# Altium PCB CH340G.PcbDoc
Units mil, origin at the board's own origin, x right, y up, seen from the top; angles counter-clockwise.
Board outline 1350 x 550 mil, 2 copper layers (Top Layer, Bottom Layer); 9 components, 9 nets, 40 pads, 8 vias.
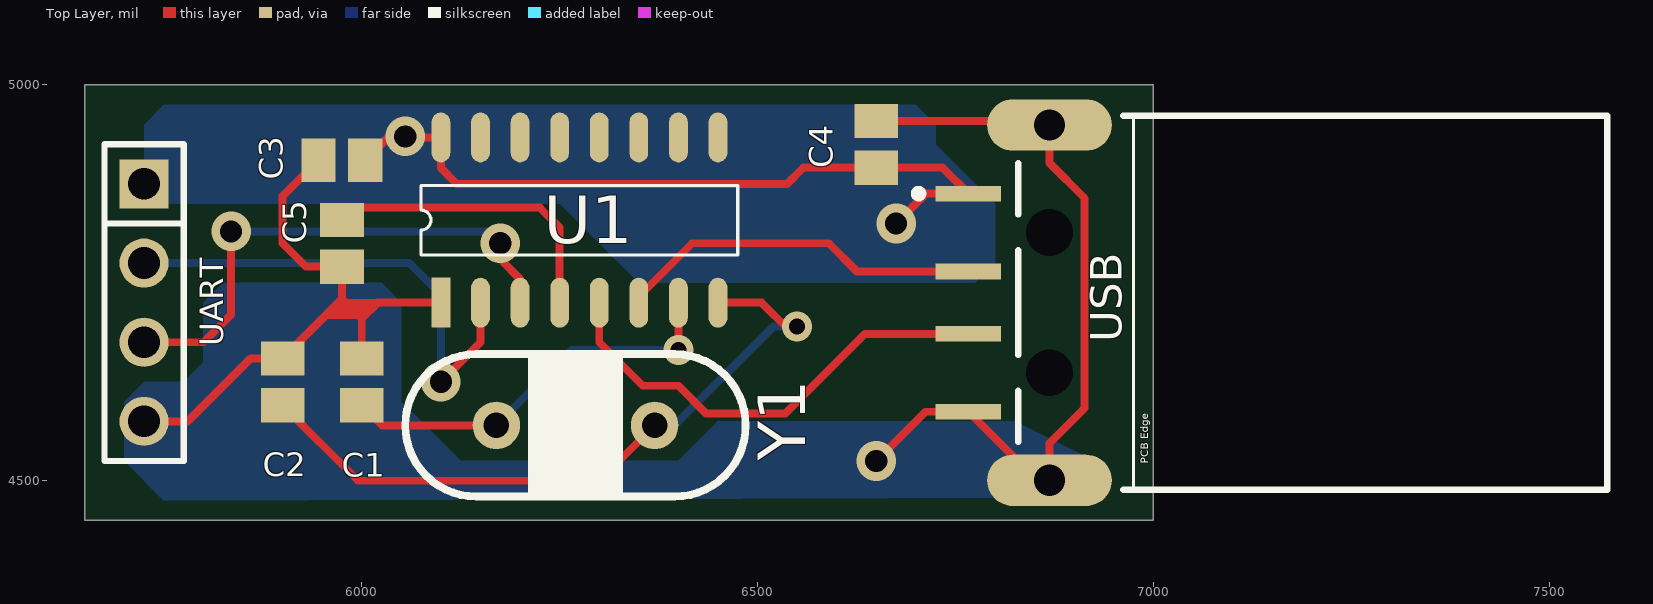
[diagram p0: Top Layer view]
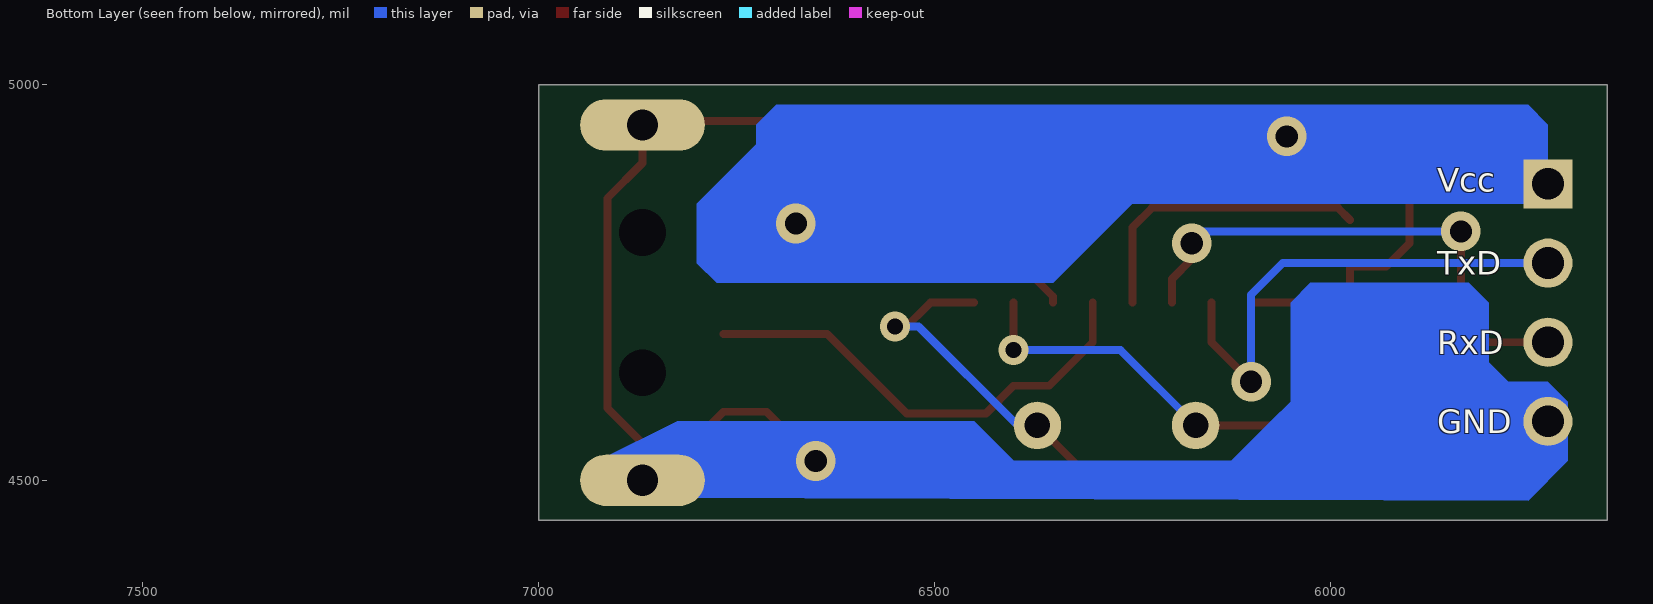
[diagram p1: Bottom Layer view, seen from below]

## Layer stack, top to bottom
Top Solder: solder mask 0.4, Solder Resist, Dk 3.5
Top Layer: signal copper 1.4
Dielectric 1: dielectric 12.6, FR-4, Dk 4.8
Bottom Layer: signal copper 1.4
Bottom Solder: solder mask 0.4, Solder Resist, Dk 3.5

## Board outline
5650,4450 5650,5000 7000,5000 7000,4450

## Design rules (kind name [scope] priority, off if disabled: settings)
Clearance [All] p1: gap=10 ignorepadtopadclearanceinfootprint=FALSE except(0: Arc-Hole Track-Hole SMDPad-Hole THPad-Hole Via-Hole Fill-Hole Poly-Hole Region-Hole Text-Hole)
PolygonConnect [All] p1: connectstyle=Relief reliefconductorwidth=10 reliefentries=4 polygonreliefangle="90 Angle" airgapwidth=10
RoutingVias [All] p1: holewidth=28 width=50 viastyle="Through Hole" minholewidth=28 minwidth=50 maxholewidth=28 maxwidth=50
SolderMaskExpansion [All] p1: expansion=4
Width [All] p1: maxlimit=10 minlimit=10 preferedwidth=10
30 further rules are at their usual default settings.

## Components (designator, comment, footprint, x,y, rotation, side; value= is the part's Value field where it differs from the comment)
C1 "Cap" C0805 6000,4625 r270 top value=30pF
C2 "Cap" C0805 5900,4625 r270 top value=30pF
C3 "Cap" C0805 5975,4905 r0 top value=10uF
C4 "Cap" C0805 6650,4925 r270 top value=104
C5 "Cap" C0805 5975,4800 r90 top value=104
U1 "CH340G" SOP16 6100,4725 r90 top
UART "UART" SIP4-2.54 5725,4725 r270 top (schematic designator J0)
USB "USB" USB01 6975,4725 r0 top (schematic designator P1)
Y1 "12M" X-HC-49S 6270,4570 r0 top

## Footprints (in the part's own frame and the unit in brackets; to place one, negate y for a bottom-side part, rotate by r counter-clockwise, add the part's x,y. Pads: shape width x height; smd on the part's side, far side on the other; paste and mask are expansions set on the pad)
C0805 [mm] "Chip Capacitor, Body 2.0x1.3mm, IPC High Density"
  rect 1.1x1.4 smd: 1(-0.75,0) 2(0.75,0)
  body extent -1.1,-0.72 1.1,0.72, height 1.4
SIP4-2.54 [mil]
  rect 62x62 hole 40: 1(-150,0)
  round 62 hole 40: 2(-50,0) 3(50,0) 4(150,0)
  silkscreen extent -200,-50 200,50
SOP16 [mm]
  rect 1.6x0.6 smd: 1(0,0)
  oval 1.6x0.6 smd: 2(0,-1.27) 3(0,-2.54) 4(0,-3.81) 5(0,-5.08) 6(0,-6.35) 7(0,-7.62) 8(0,-8.89) 9(5.3,-8.89) 10(5.3,-7.62) 11(5.3,-6.35) 12(5.3,-5.08) 13(5.3,-3.81) 14(5.3,-2.54) 15(5.3,-1.27) 16(5.3,0)
  silkscreen extent 1.53,-9.53 3.77,0.64
USB01 [mm] "Connector; USB1.1, Type A, SM; 4 Position; Right Angle"
  rect 2.1x0.5 smd: 1(-5.3,3.5) 2(-5.3,1) 3(-5.3,-1) 4(-5.3,-3.5)
  oval 4x1.65 hole 1: 5(-2.7,-5.7) 6(-2.7,5.7)
  round 1.2 hole 1.5 unplated: MH1(-2.7,-2.25) MH2(-2.7,2.25)
  silkscreen extent -7.02,-6 15.2,6
X-HC-49S [mil] "插件晶振"
  round 60 hole 32: 1(-100,0) 2(100,0)
  silkscreen extent -215,-90 215,90

## Part data
C1 C2 C3 C4 C5: "Capacitor", LatestRevisionDate=17-Jul-2002, LatestRevisionNote="Re-released for DXP Platform.", PackageDescription="Radial Cap, Thru-Hole; 2 Leads; 0.3 in Pin Spacing", PackageReference=RAD-0.3, Published=8-Jun-2000, Publisher="Altium Limited"
USB: "USB 1.1, Right Angle, SMT, A Type, Plug, 4 Position, Natural", PackageDocument=21-Jan-2003, ComponentLink1Description="Manufacturer Link", ComponentLink1URL=http://www.tycoelectronics.com/, ComponentLink2Description="Packaging Specification", ComponentLink2URL=http://ecommas.tycoelectronics.com/commerce/DocumentDelivery/DDEController?Action=showdoc&DocId=Customer+Drawing%7F1470695%7FO%7Fpdf%7FEnglish%7FC_1470695_O.pdf, ContactMaterial=Brass, ContactPlating="Gold (30) over Nickel (50)", DatasheetDocument=21-Jan-2003, DrillSize="Corresponds to nominal value.", HousingMaterial=Thermoplastic, PackageReference=1470695A, PanelGround=Without, PCB_Layout="Complies with manufacturer's recommendation.", Published=15-Jul-2004, Publisher="Altium Limited"
Y1: library part XTAL, "Crystal Oscillator", LatestRevisionDate=17-Jul-2002, LatestRevisionNote="Re-released for DXP Platform.", PackageDescription="Crystal, Thru-Hole; 2 Leads; Body 3.1 x 8.2 mm (Dia.xH)", PackageReference=R38, Published=8-Jun-2000, Publisher="Altium Limited"

## Via types
v1: diameter 50, hole 28, Top Layer to Bottom Layer, 6 vias
v2: diameter 38, hole 20, Top Layer to Bottom Layer, 2 vias

## Nets (pads, with @x,y where several pads share a name; then routed paths per layer and width w, separated by ;. In a path a pad name is that pad's centre, name@x,y a point inside that pad or via, vN(x,y) a via of type N, cw(c..) or ccw(c..) an arc to the next point about the centre after c; other vN are vias at no path point)
3V3: C5.2 U1.4 | length 386.8
  Top Layer w10: C5.2 5990.47,4845 6225,4845 6250,4820 U1.4
GND: C1.1 C2.1 C3.1 C4.1 C5.1 U1.1 UART.4 USB.4 USB.5 USB.6 | length 1746.7
  Top Layer w10: UART.4 5780,4575 5859.53,4654.53 C2.1 5975,4729.53 ; C3.1 5900,4859.53 5900,4800 5929.53,4770.47 C5.1 5975,4729.53 ; C1.1 6000,4704.53 ; U1.1 6020.47,4725 6000,4704.53 ; v1(6650,4525) 6712.2,4587.2 USB.4 6852.95,4500.59 USB.5 6868.7,4547.36 6913.23,4591.89 6913.23,4856.77 6868.7,4901.3 USB.6 6863.58,4954.53 C4.1 ; 5975,4729.53 6000,4704.53
NetC1_2: C1.2 U1.7 Y1.1 | length 509.9
  Top Layer w10: C1.2 6025.47,4570 Y1.1 ; v2(6400,4665) U1.7
  Bottom Layer w10: Y1.1 6265,4665 v2(6400,4665)
NetC2_2: C2.2 U1.8 Y1.2 | length 874.8
  Top Layer w10: C2.2 5995.47,4500 6300,4500 Y1.2 ; U1.8 6505,4725 v2@6540,4690
  Bottom Layer w10: Y1.2 6395,4570 6520,4695 v2(6550,4695)
NetJ0_2: U1.2 UART.2 | length 622.3
  Top Layer w10: v1(6100,4625) 6150,4675 U1.2
  Bottom Layer w10: UART.2 6060,4775 6100,4735 v1(6100,4625)
NetJ0_3: U1.3 UART.3 | length 661.1
  Top Layer w10: UART.3 5800,4675 5835,4710 v1(5835,4815) ; v1(6175,4800) 6175,4780 6200,4755 U1.3
  Bottom Layer w10: v1(5835,4815) 6160,4815 v1(6175,4800)
NetP1_2: U1.6 USB.2 | length 466.6
  Top Layer w10: U1.6 6350,4732.6 6417.4,4800 6590,4800 6625.63,4764.37 USB.2
NetP1_3: U1.5 USB.3 | length 595.3
  Top Layer w10: U1.5 6300,4675 6355,4620 6400,4620 6435,4585 6535,4585 6635.63,4685.63 USB.3
VCC: C3.2 C4.2 U1.16 UART.1 USB.1 | length 949.6
  Top Layer w10: C3.2 6033.19,4933.66 U1.16 6100,4895 6120,4875 6537.2,4875 6557.68,4895.47 C4.2 6733.66,4895.47 USB.1 6712.8,4862.8 v1(6675,4825)
  other v1: 6055,4935
pads on no net: U1.9 U1.10 U1.11 U1.12 U1.13 U1.14 U1.15 USB.MH1 USB.MH2

## Polygon pours and split planes (outlines as drawn)
no net on Top Layer (solid, pour order 0): 5975,4729.53

## Other copper
Top Layer:
  region net GND: 6020.47,4725 6030,4729.53 5975,4729.53 5950.47,4705 5950.95,4704.53 6000,4704.53
  region net GND: 5975,4729.53
Bottom Layer:
  region net GND: 6075,4575 6050,4600 6050,4725 6025,4750 5825,4750 5800,4725 5800,4650 5775,4625 5725,4625 5700,4600 5700,4550 5750,4500 6035,4500 6035,4535
  region net VCC: 6725,4950 6725,4925 6800,4850 6800,4775 6775,4750 6350,4750 6250,4850 5725,4850 5725,4950 5750,4975 6700,4975
  region net GND: 6825,4575 6925,4525 6868.7,4500.59 6846.56,4478.45 5750,4475 5700,4525 5700,4575 6075,4575 6125,4525 6400,4525 6450,4575

## Silkscreen, mask and mechanical layers (free items; w line width, h text height)
Bottom Overlay:
  text "Vcc" at 5865,4865 h30
  text "TxD" at 5865,4760 h30
  text "RxD" at 5865,4660 h30
  text "GND" at 5865,4560 h30
Mechanical 1:
  the board outline again, w10

## Text inside footprints (layer, text, board x,y; h text height)
USB: Top Overlay "PCB Edge" at 6993.61,4521.35 h9.84 r90